# EAGLE board Combined-3 (EAGLE 6.5.0)
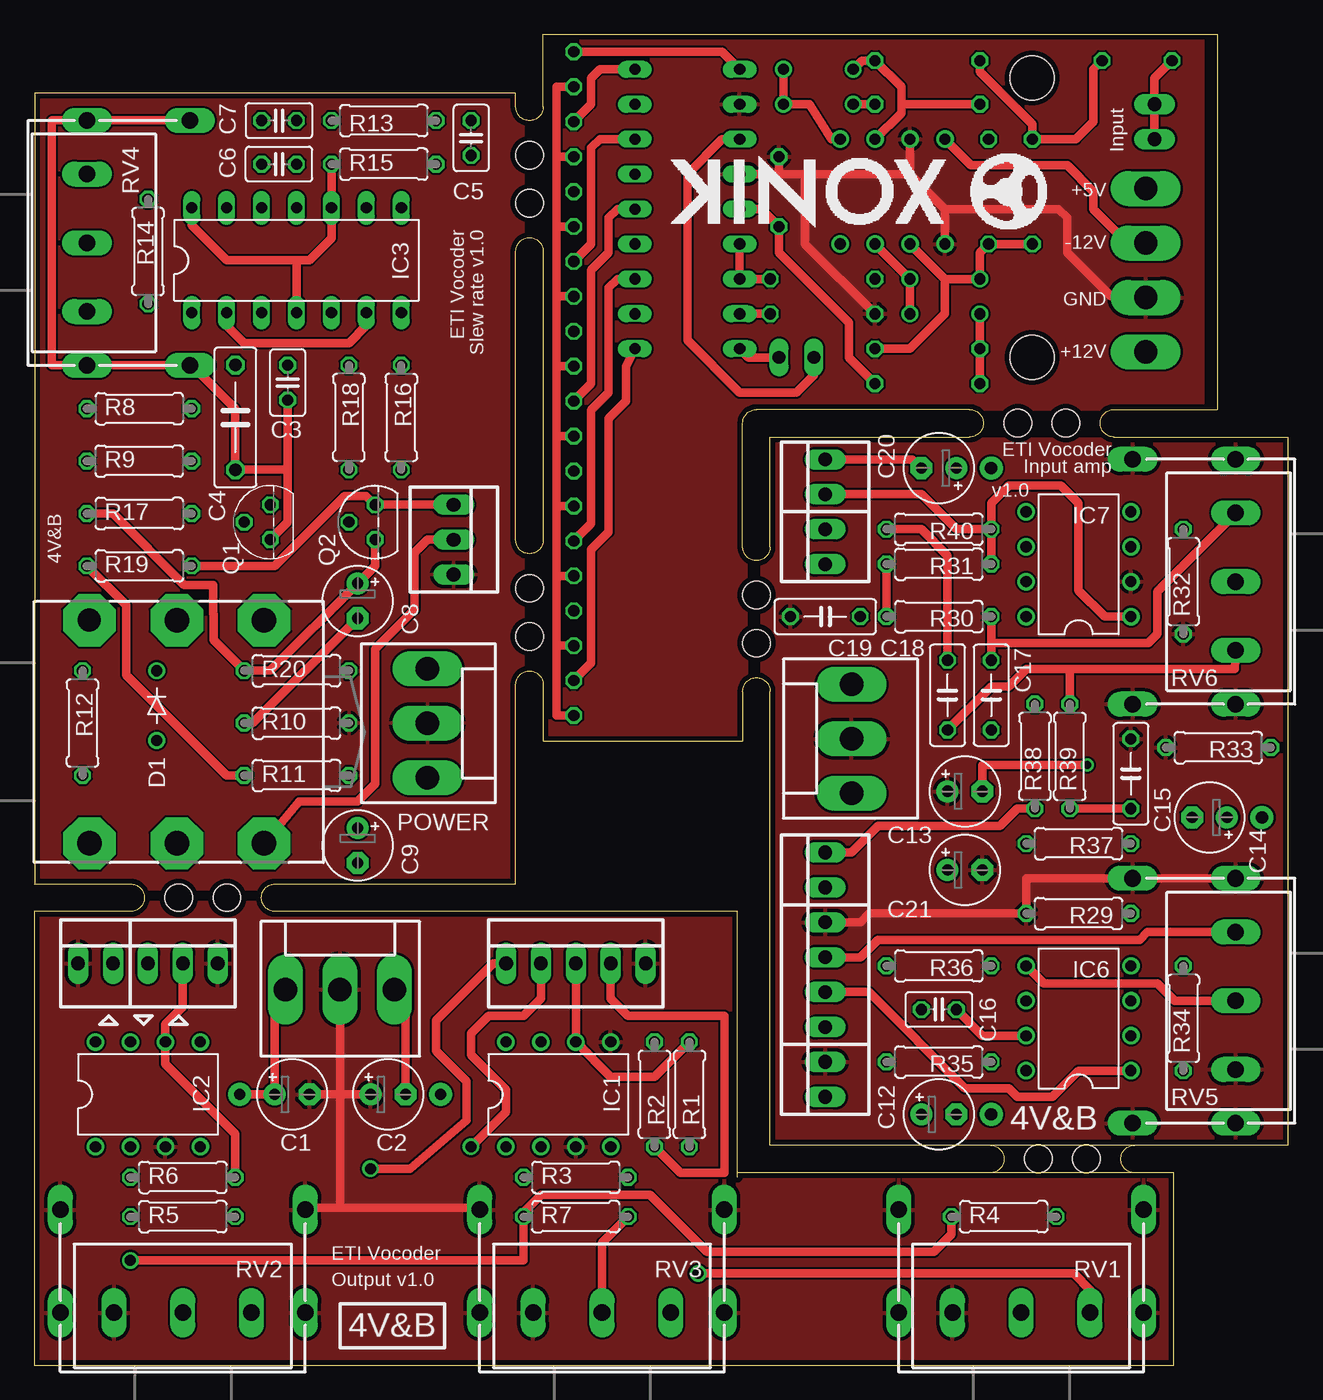
[diagram p0: board, top side]
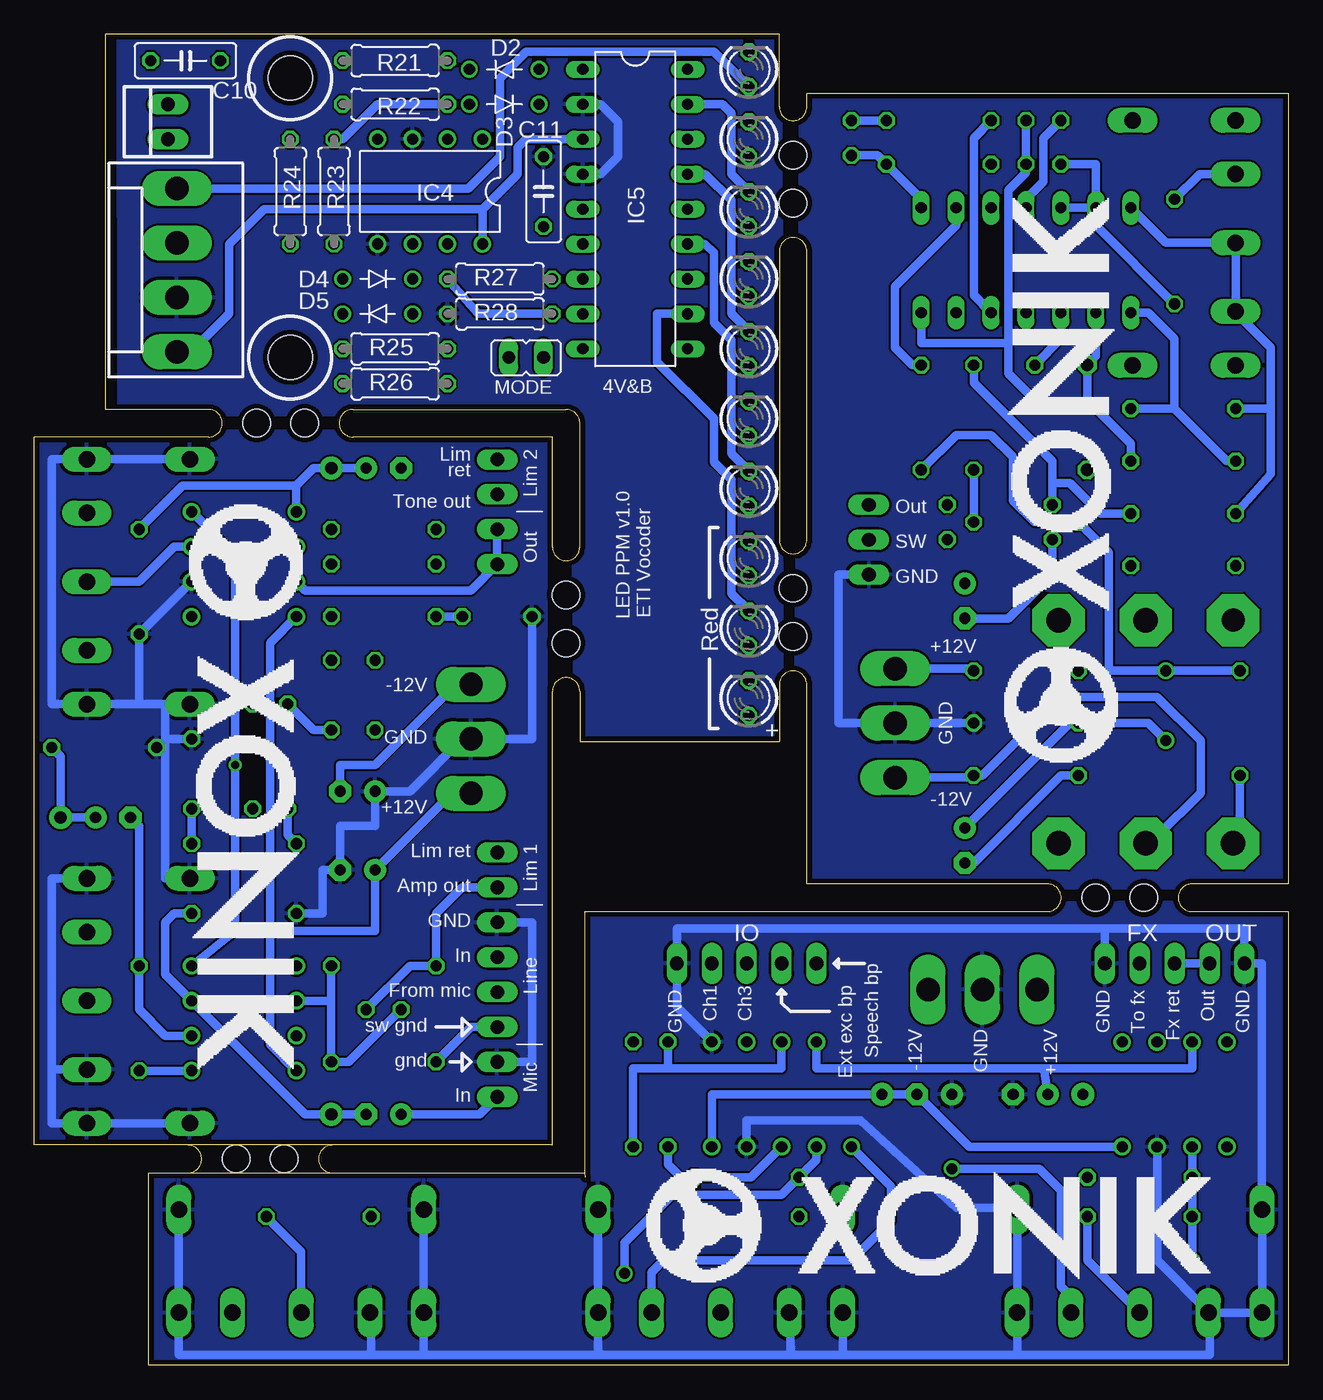
[diagram p1: board, bottom side, seen from below]

Size 91.16 x 96.76 mm. Coordinates in mm from the lower left corner, seen from the top.
Outline: 51.12,13.99 82.86,13.99 82.86,0 0,0 0,32.99 7,32.99 arc180 7,34.99 0,34.99
Outline: 51.11,13.65 51.12,13.99
Outline: 51.12,13.99 51.12,32.99 17.5,32.99 arc-180 17.5,34.99 35,34.99 35,49.49 arc-180 37,49.49 37,45.33 51.5,45.33 51.5,48.99 arc-180 53.5,48.99 53.5,15.99
Outline: 0.01,34.99 0.01,92.49 35,92.49 35,91.49 arc180 37,91.49 37,96.76 86,96.76 86,69.49 78.5,69.49 arc180 78.5,67.49 91.16,67.49 91.16,16.01 53.5,16.01
Outline: 51.5,68.5 51.5,68.49
Outline: 80,13.99 arc-180 80,15.99
Outline: 69.5,15.99 arc-180 69.5,13.99
Outline: 51.5,68.49 arc-90 52.5,69.49 68,69.49 arc-180 68,67.49 53.5,67.49 53.5,59.49 arc-180 51.5,59.49 51.5,68.49
Outline: 35,80.99 arc-180 37,80.99 37,59.99 arc-180 35,59.99 35,80.99
Copper layers (1*16): Top 0.0356mm / dielectric 1.5011mm / Bottom 0.0356mm
Design rules "oshpark-2layer": minimum track width 6mil, minimum drill 13mil, track to track 6mil, track to pad 6mil, pad to pad 6mil, via to via 6mil, smd to smd 6mil, copper to edge 15mil, drill to drill 6mil, minimum pad ring 7mil, minimum via ring 7mil, stop-mask expansion 2.5mil, vias tented up to drill 0mil, thermal gap 10mil
Holes 3.2 mm at 72.56,93.58 72.56,73.27
Holes 2 mm at 10.5,33.99 14,33.99 76.5,14.99 73,14.99 75,68.49 71.5,68.49 52.5,55.99 52.5,52.49 36,87.99 36,84.49 36,56.49 36,52.99

## Footprints (pad centres in the part's own frame; a part is rotated, then mirrored left to right if it is on the bottom)
E2,5-5 = drill 0.813 pad 1.6: + -1.27,0 | drill 0.813 pad 1.6 octagon: - 1.27,0
C025-025X050 = drill 0.813 octagon: 1 -1.27,0; 2 1.27,0
C075-032X103 = drill 0.914 octagon: 1 -3.81,0; 2 3.81,0
C050-025X075 = drill 0.813 octagon: 1 -2.54,0; 2 2.54,0
NMJ6HCD2 = drill 1.778 pad 3.81 octagon: R -10.35,8.115; RN -10.35,-8.115; S -4,8.115; T -16.7,8.115; TN -16.7,-8.115 | drill 1.676 pad 3.81 octagon: SN -4,-8.115
DO35-5J = drill 0.813: A 2.54,0; C -2.54,0
DIL08 = drill 0.813 pad 1.27: 1 -3.81,-3.81; 2 -1.27,-3.81; 3 1.27,-3.81; 4 3.81,-3.81; 5 3.81,3.81; 6 1.27,3.81; 7 -1.27,3.81; 8 -3.81,3.81
DIL14 = drill 0.813 long: 1 -7.62,-3.81; 2 -5.08,-3.81; 3 -2.54,-3.81; 4 0,-3.81; 5 2.54,-3.81; 6 5.08,-3.81; 7 7.62,-3.81; 8 7.62,3.81; 9 5.08,3.81; 10 2.54,3.81; 11 0,3.81; 12 -2.54,3.81; 13 -5.08,3.81; 14 -7.62,3.81
DIL18 = drill 0.813 long: 1 -10.16,-3.81; 2 -7.62,-3.81; 3 -5.08,-3.81; 4 -2.54,-3.81; 5 0,-3.81; 6 2.54,-3.81; 7 5.08,-3.81; 8 7.62,-3.81; 9 10.16,-3.81; 10 10.16,3.81; 11 7.62,3.81; 12 5.08,3.81; 13 2.54,3.81; 14 0,3.81; 15 -2.54,3.81; 16 -5.08,3.81; 17 -7.62,3.81; 18 -10.16,3.81
22-23-2021 = drill 1 long: 1 -1.27,0; 2 1.27,0
22-23-2031 = drill 1 long: 1 -2.54,0; 2 0,0; 3 2.54,0
LED3MM = drill 0.813 octagon: A -1.27,0; K 1.27,0
22-23-2041 = drill 1 long: 1 -3.81,0; 2 -1.27,0; 3 1.27,0; 4 3.81,0
JP1 = drill 0.914 long: 1 0,-1.27; 2 0,1.27
KK-156-3 = drill 1.7 pad 2.184 long: 1 -3.96,0; 2 0,0; 3 3.96,0
KK-156-4 = drill 1.7 pad 2.184 long: 1 -5.94,0; 2 -1.98,0; 3 1.98,0; 4 5.94,0
TO92 = drill 0.813 octagon: 1 1.27,0; 2 0,1.905; 3 -1.27,0
0207/7 = drill 0.813 octagon: 1 -3.81,0; 2 3.81,0
POT16_W_BRACKET = drill 1.2 long: 1A -5,0; 1E 5,0; 1S 0,0; M1 -8.9,0; M2 8.9,0; M3 8.9,7.5; M4 -8.9,7.5
22-23-2051 = drill 1 long: 1 -5.08,0; 2 -2.54,0; 3 0,0; 4 2.54,0; 5 5.08,0

## Placement (x,y rotation side)
C1  1uF  [E2,5-5]  18.73,19.69 0 top
C2  1uF  [E2,5-5]  25.72,19.69 0 top
C3  10n  [C025-025X050]  18.42,71.45 90 top
C4  33n  [C075-032X103]  14.61,68.91 270 top
C5  100p  [C025-025X050]  31.76,89.23 270 top
C6  560p  [C025-025X050]  17.79,87.32 180 top
C7  10n  [C025-025X050]  17.79,90.5 0 top
C8  22u  [E2,5-5]  23.5,55.57 270 top
C9  22u  [E2,5-5]  23.5,37.79 270 top
C10  220n  [C050-025X075]  80.18,94.86 0 bottom
C11  470n  [C050-025X075]  54.14,85.33 270 bottom
C12  1u  [E2,5-5]  65.77,18.23 0 top
C13  22u/25V  [E2,5-5]  67.67,41.73 0 top
C14  22u  [E2,5-5]  85.45,39.82 180 top
C15  220n  [C050-025X075]  79.73,43 90 top
C16  68p  [C025-025X050]  65.77,25.85 0 top
C17  2n2  [C050-025X075]  69.58,48.71 90 top
C18  2n2  [C050-025X075]  66.4,48.71 90 top
C19  220n  [C050-025X075]  57.51,54.43 0 top
C20  1u  [E2,5-5]  65.77,65.22 180 top
C21  22u/25V  [E2,5-5]  67.67,36.01 0 top
CN1  NMJ6HCD2  [NMJ6HCD2]  0,46.05 180 top
D1  1N4148  [DO35-5J]  8.9,47.95 270 top
D2  1N4148DOJ35-5  [DO35-5J]  57,94.22 0 bottom
D3  1N4148DOJ35-5  [DO35-5J]  57,91.68 180 bottom
D4  1N4148DOJ35-5  [DO35-5J]  66.21,78.98 180 bottom
D5  1N4148DOJ35-5  [DO35-5J]  66.21,76.44 0 bottom
IC1  LM1458N  [DIL08]  38.1,19.69 0 top
IC2  LM741P  [DIL08]  8.25,19.69 0 top
IC3  LM556N  [DIL14]  19.06,80.34 0 top
IC4  TL082P  [DIL08]  62.4,85.33 180 bottom
IC5  LM3915N  [DIL18]  47.47,84.06 270 bottom
IC6  LM4558N  [DIL08]  75.92,25.22 90 top
IC7  LM1458N  [DIL08]  75.92,58.24 90 top
IN  22-23-2021  [22-23-2021]  81.45,90.41 90 bottom
J1  22-23-2031  [22-23-2031]  10.79,29.21 0 top
LED1  [LED3MM]  39.22,94.22 90 bottom
LED2  [LED3MM]  39.22,89.14 90 bottom
LED3  [LED3MM]  39.22,84.06 90 bottom
LED4  [LED3MM]  39.22,78.98 90 bottom
LED5  [LED3MM]  39.22,73.9 90 bottom
LED6  [LED3MM]  39.22,68.82 90 bottom
LED7  [LED3MM]  39.22,63.74 90 bottom
LED8  [LED3MM]  39.22,58.66 90 bottom
LED9  [LED3MM]  39.22,53.58 90 bottom
LED10  [LED3MM]  39.22,48.5 90 bottom
LIM1  22-23-2021  [22-23-2021]  57.51,36.01 90 top
LIM2  22-23-2021  [22-23-2021]  57.51,64.59 90 top
LINE  22-23-2041  [22-23-2041]  57.51,28.39 90 top
MIC  22-23-2021  [22-23-2021]  57.51,20.77 90 top
MODE  [JP1]  55.41,73.27 90 bottom
OUT  22-23-2021  [22-23-2021]  57.51,59.51 90 top
POWER  [KK-156-3]  28.58,46.68 270 top
POWER1  [KK-156-4]  80.81,79.61 90 bottom
POWER2  [KK-156-3]  59.41,45.54 90 top
Q1  2N3904  [TO92]  17.15,61.29 90 top
Q2  2N3906  [TO92]  24.77,61.29 90 top
R1  22k  [0207/7]  47.62,19.69 270 top
R2  22k  [0207/7]  45.09,19.69 270 top
R3  33k  [0207/7]  39.37,13.65 180 top
R4  22k  [0207/7]  70.48,10.79 180 top
R5  22k  [0207/7]  10.79,10.79 0 top
R6  22k  [0207/7]  10.79,13.65 0 top
R7  22k  [0207/7]  39.37,10.79 180 top
R8  15k  [0207/7]  7.63,69.54 180 top
R9  2k2  [0207/7]  7.63,65.73 0 top
R10  47R  [0207/7]  19.06,46.68 0 top
R11  220R  [0207/7]  19.06,42.87 0 top
R12  470R  [0207/7]  3.5,46.68 90 top
R13  1k  [0207/7]  25.41,90.5 0 top
R14  2k2  [0207/7]  8.26,80.97 90 top
R15  10k  [0207/7]  25.41,87.32 0 top
R16  10k  [0207/7]  26.68,68.91 270 top
R17  2k2  [0207/7]  7.63,61.92 180 top
R18  10k  [0207/7]  22.87,68.91 90 top
R19  2k2  [0207/7]  7.63,58.11 180 top
R20  47R  [0207/7]  19.06,50.49 0 top
R21  100k  [0207/7]  64.94,94.86 180 bottom
R22  100k  [0207/7]  64.94,91.68 180 bottom
R23  100k  [0207/7]  69.38,85.33 90 bottom
R24  200k  [0207/7]  72.56,85.33 90 bottom
R25  200k  [0207/7]  64.94,73.9 0 bottom
R26  1k  [0207/7]  64.94,71.36 0 bottom
R27  680R  [0207/7]  57.32,78.98 0 bottom
R28  150R  [0207/7]  57.32,76.44 0 bottom
R29  100k  [0207/7]  75.92,32.84 0 top
R30  47k  [0207/7]  65.77,54.43 180 top
R31  1k5  [0207/7]  65.77,58.24 0 top
R32  100k  [0207/7]  83.55,56.97 90 top
R33  470R/5k6  [0207/7]  86.08,44.9 0 top
R34  22k  [0207/7]  83.55,25.22 90 top
R35  11k  [0207/7]  65.77,22.04 0 top
R36  100k  [0207/7]  65.77,29.03 180 top
R37  1k5  [0207/7]  75.92,37.92 0 top
R38  51k  [0207/7]  72.75,44.27 90 top
R39  47k  [0207/7]  75.29,44.27 270 top
R40  51k  [0207/7]  65.77,60.78 0 top
RV1  10k log  [POT16_W_BRACKET]  71.75,3.81 0 top
RV2  10k log  [POT16_W_BRACKET]  10.79,3.81 0 top
RV3  10k log  [POT16_W_BRACKET]  41.27,3.81 0 top
RV4  1M log  [POT16_W_BRACKET]  3.82,81.61 270 top
RV5  10k log  [POT16_W_BRACKET]  87.36,26.49 90 top
RV6  47k lin  [POT16_W_BRACKET]  87.36,56.97 90 top
X1  [KK-156-3]  22.23,27.3 0 top
X2  22-23-2051  [22-23-2051]  39.37,29.21 0 top
X3  22-23-2021  [22-23-2021]  4.45,29.21 0 top
X4  22-23-2031  [22-23-2031]  30.49,60.02 270 top

## Library data of the parts
C1-C5 C7-C21 R1-R40 = resistor
C6 D1-D5 RV1-RV6 = joakim
CN1 = audio
IC1-IC3 IC6 IC7 = linear
IC4 = linear; DATA_SHEET: <a href="http://www.ti.com/lit/ds/symlink/tl084a.pdf"> Data sheet </a>
IC5 = national-semiconductor
IN LIM1 LIM2 MIC OUT X3 = con-molex; MF: MOLEX; MPN: 22-23-2021; OC_FARNELL: 1462926; OC_NEWARK: 25C3832
J1 X4 = con-molex; MF: MOLEX; MPN: 22-23-2031; OC_FARNELL: 1462950; OC_NEWARK: 30C0862
LED1-LED10 = led
LINE = con-molex; MF: MOLEX; MPN: 22-23-2041; OC_FARNELL: 1462920; OC_NEWARK: 38C0355
MODE = jumper
POWER POWER1 POWER2 X1 = con-molex; OC_FARNELL: unknown; OC_NEWARK: unknown
Q1 = transistor
Q2 = transistor-pnp
X2 = con-molex; MF: MOLEX; MPN: 22-23-2051; OC_FARNELL: 1462952; OC_NEWARK: 38C9178

## Nets
0V: C3.1 C4.2 C6.1 C7.2 C8.- C9.+ D1.A IC3.7 Q1.3 R10.1 RV4.M1 RV4.M2 RV4.M3 RV4.M4
+5V: LED1.A LED2.A LED3.A LED4.A LED5.A LED6.A LED7.A LED8.A LED9.A LED10.A POWER1.4
+11V: C8.+ IC3.4 IC3.10 IC3.14 Q2.3 R8.2 R15.1 R17.2 R20.1 RV4.1E RV4.1S
+12V: C1.+ IC1.8 IC2.7 X1.1
+12V1: POWER.1 R20.2
+12V2: IC4.8 IC5.3 MODE.2 POWER1.1
+12V3: C21.+ IC6.8 IC7.8 POWER2.1
-11V: C9.- R11.1 R19.2
-12V: C2.- IC1.4 IC2.4 X1.3
-12V1: CN1.R POWER.3 R11.2
-12V2: IC4.4 POWER1.3
-12V3: C13.- IC6.4 IC7.4 POWER2.3
AMP_OUT: C16.2 IC6.7 LIM1.1 R36.2
BUFFER_IN: C20.- LIM2.2
CH1-2-4: IC1.2 R2.2 R3.1 X2.4
CH3-5-7: IC1.6 R1.1 X2.3
EXT_EXCIT: RV3.1E X2.2
FROM_V/UV_SWITCH: CN1.T X4.2
FX_RETURN: J1.1 X3.2
GND: C1.- C2.+ IC1.3 IC1.5 IC2.3 J1.3 RV1.1A RV1.M1 RV1.M2 RV1.M3 RV1.M4 RV2.1A RV2.M1 RV2.M2 RV2.M3 RV2.M4 RV3.1A RV3.M1 RV3.M2 RV3.M3 RV3.M4 X1.2 X2.5 X3.1
GND1: POWER.2 R10.2 X4.3
GND2: C11.1 IC4.3 IC4.5 IC5.2 IC5.4 POWER1.2 R28.1
GND3: C13.+ C15.2 C19.1 C21.- IC7.2 LINE.4 MIC.2 POWER2.2 R29.1 R32.1 R33.1 RV5.1A RV5.M1 RV5.M2 RV5.M3 RV5.M4 RV6.M1 RV6.M2 RV6.M3 RV6.M4
LINE_IN: LINE.3 RV5.1E
MIC_IN: C12.+ MIC.1
MIC_OUT: IC6.1 LINE.2 R34.1
MIX: IC2.6 J1.2 R6.2
MODE: IC5.9 MODE.1
N$1: R4.1 RV1.1S
N$2: C5.2 IC3.8 R15.2
N$3: IC1.7 R1.2 R2.1
N$4: C4.1 IC3.2 IC3.6 R9.2
N$5: C7.1 IC3.11
N$6: IC1.1 R3.2 RV1.1E
N$7: R7.1 RV3.1S
N$8: IC2.2 R4.2 R5.1 R6.1 R7.2
N$9: IC3.9 R16.1
N$10: R5.2 RV2.1S
N$11: C6.2 IC3.12 IC3.13 R14.1
N$12: C5.1 R13.2
N$13: IC3.5 R13.1
N$14: IC3.1 R8.1 R9.1
N$15: R14.2 RV4.1A
N$16: C3.2 IC3.3
N$17: D1.C Q1.2 R12.2 R16.2
N$18: Q1.1 R17.1 R18.2
N$19: Q2.2 R18.1
N$20: CN1.S R12.1
N$21: D3.A R22.1 R23.2
N$22: D2.C IC4.2 R21.1 R22.2
N$23: D2.A D3.C IC4.1
N$24: D4.A IC4.6 R23.1 R24.1 R25.2
N$25: D5.C R25.1 R26.1
N$26: C10.2 R21.2 R24.2
N$27: D4.C D5.A IC4.7
N$28: C11.2 IC5.5 R26.2
N$29: IC5.6 IC5.7 R27.2
N$30: IC5.1 LED1.K
N$31: IC5.18 LED2.K
N$32: IC5.17 LED3.K
N$33: IC5.16 LED4.K
N$34: IC5.15 LED5.K
N$35: IC5.14 LED6.K
N$36: IC5.13 LED7.K
N$37: IC5.12 LED8.K
N$38: IC5.11 LED9.K
N$39: IC5.10 LED10.K
N$40: C10.1 IN.1 IN.2
N$41: IC5.8 R27.1 R28.2
N$42: C12.- IC6.3 R29.2
N$43: C14.- IC6.2 R34.2
N$44: C14.+ R33.2
N$45: C16.1 IC6.6 R35.2 R36.1
N$46: C15.1 R37.2 R39.2
N$47: C18.1 R39.1 RV6.1A
N$48: C17.2 R30.1 RV6.1E
N$49: C17.1 R38.2
N$50: C18.2 R40.1
N$51: C19.2 R30.2 R31.1
N$52: C20.+ IC7.5 R32.2
N$53: IC7.3 RV6.1S
N$54: IC6.5 RV5.1S
OUT: Q2.1 R19.1 X4.1
OUT1: IC7.6 IC7.7 OUT.1 OUT.2
SPEECH: RV2.1E X2.1
SWITCHED_GND: LINE.1 R35.1
TONE_IN: LIM1.2 R37.1 R38.1
TONE_OUT: IC7.1 LIM2.1 R31.2 R40.2

## Tracks (layer width: path | path; a pad name or v marks a point on that pad's centre or on a via)
0V
  Top 0.61: RV4.M1 RV4.M4 1.29,90.51 1.28,90.5 1.28,72.72 3.81,72.72 RV4.M2 RV4.M3 11.43,72.71 11.44,72.72 14.61,69.54 C4.2 18.42,65.1 | R10.1 15.88,46.68 C8.- | Q1.3 18.42,61.29 18.42,65.1 | C3.1 18.42,65.1
  Bottom 0.61: C7.2 C6.1 19.06,86.69 20.33,85.42 20.33,74.31 | 20.33,74.31 26.68,74.31 IC3.7 | 20.33,74.31 20.33,72.08 C3.1 | C8.- 20.33,54.3 17.15,57.48 Q1.3 | C9.+ 15.88,46.68 R10.1 10.17,46.68 D1.A
+5V
  Top 0.61: LED10.A 37.95,47.23 37.95,52.31 | 37.95,52.31 37.95,57.39 | 37.95,57.39 37.95,62.47 | 37.95,62.47 37.95,67.55 | 37.95,67.55 37.95,72.63 | 37.95,72.63 37.95,77.71 | 37.95,77.71 37.95,82.79 | 37.95,82.79 37.95,87.87 | 37.95,87.87 37.95,92.95 LED1.A | LED2.A 37.95,87.87 | LED3.A 37.95,82.79 | LED4.A 37.95,77.71 | LED5.A 37.95,72.63 | LED6.A 37.95,67.55 | LED7.A 37.95,62.47 | LED8.A 37.95,57.39 | LED9.A 37.95,52.31
  Bottom 0.61: POWER1.4 59.63,85.55 57.32,87.87 57.32,93.58 55.41,95.49 41.76,95.49 LED1.A
+11V
  Top 0.61: R15.1 IC3.10 21.6,81.93 20.01,80.34 19.06,80.34 | 19.06,80.34 13.98,80.34 11.44,82.88 IC3.14 | R17.2 5.72,61.92 10.9,56.74 13,56.74 13,54.62 13.03,54.62 13.03,52.72 R20.1 17.15,50.49 C8.+ 24.77,58.11 Q2.3 | IC3.4 19.06,80.34
  Bottom 0.61: IC3.14 8.9,81.61 RV4.1S RV4.1E 3.82,76.53 1.28,73.99 1.28,69.54 | 1.28,69.54 R8.2 | R17.2 1.28,64.78 1.28,69.54
+12V  (via drill 0.8 pad 1.68)
  Top 0.61: X1.1 17.46,26.5 C1.+ v14.92,19.69
  Bottom 0.61: IC1.8 34.29,21.59 17.78,21.59 | IC2.7 6.98,21.59 17.78,21.59 | 17.78,21.59 C1.+
+12V1
  Bottom 0.61: POWER.1 23.02,50.64 R20.2
+12V2
  Top 0.61: IC5.3 50.02,89.14 47.47,86.6 47.47,74.53 51.28,70.72 55.41,70.72 56.68,71.99 MODE.2
  Bottom 0.61: IC5.3 55.41,89.14 56.05,88.5 56.05,86.6 58.59,84.06 | 58.59,84.06 IC4.8 | POWER1.1 79.77,73.68 77,76.44 77,81.52 74.46,84.06 58.59,84.06
+12V3
  Bottom 0.61: IC6.8 74.02,23.31 74.02,31.57 | 74.02,31.57 74.02,52.52 IC7.8 | POWER2.1 59.56,41.73 60.68,41.73 C21.+ 66.4,31.57 74.02,31.57
-11V
  Top 0.61: R19.2 6.68,55.26 6.68,50.18 13.98,42.87 R11.1
  Bottom 0.61: C9.- 22.87,36.52 16.52,42.87 R11.1
-12V  (via drill 0.8 pad 1.68)
  Top 0.61: C2.- 26.99,26.52 X1.3
  Bottom 0.61: IC2.4 23.18,15.87 C2.- v29.53,19.69 41.91,19.69 IC1.4
-12V1
  Bottom 0.61: POWER.3 23.02,42.72 R11.2 22.23,42.87 16.52,48.59 9.53,48.59 6.36,45.41 6.36,41.6 9.53,38.43 9.85,37.93 CN1.R
-12V2
  Top 0.61: POWER1.3 79.47,81.6 77,84.06 77,85.33 75.1,87.24 68.11,87.24 IC4.4
-12V3  (via drill 0.6)
  Top 0.61: v76.56,43.63 68.94,43.63 C13.-
  Bottom 0.61: POWER2.3 60.53,49.5 66.4,43.63 68.94,43.63 C13.- | IC6.4 76.56,31.57 v76.56,43.63 76.56,58.87 IC7.4
AMP_OUT
  Top 0.61: C16.2 68.94,23.95 IC6.7
  Bottom 0.61: LIM1.1 60.05,34.74 61.96,32.84 R36.2 63.86,29.03 C16.2
BUFFER_IN
  Top 0.61: C20.- 63.86,65.86 LIM2.2
CH1-2-4
  Top 0.61: X2.4 41.91,26.67 43.18,25.4 50.17,25.4 50.17,13.97 46.99,13.97 R2.2
  Bottom 0.61: IC1.2 39.05,13.65 R3.1 44.13,13.65 45.09,14.6 R2.2
CH3-5-7
  Top 0.61: R1.1 45.09,20.96 41.91,20.96 IC1.6 X2.3
EXT_EXCIT  (via drill 0.8)
  Top 0.61: v31.75,15.87 34.29,18.41 34.29,20 31.75,22.54 31.75,24.13 33.02,25.4 35.56,25.4 36.83,26.67 X2.2
  Bottom 0.61: RV3.1E 46.28,6.75 45.4,7.62 31.75,7.62 28.89,10.48 28.89,13.02 v31.75,15.87
FROM_V/UV_SWITCH
  Top 0.61: X4.2 28.58,60.02 27.63,59.07 27.63,54.94 24.77,52.08 24.77,42.24 23.5,40.97 19.24,40.97 CN1.T
FX_RETURN
  Bottom 0.61: X3.2 J1.1
GND
  Top 0.61: X1.2 22.23,19.69 | 22.23,19.69 C1.- | C2.+ 22.23,19.69 | 22.23,19.69 22.23,11.43 | 22.23,11.43 19.81,11.43 RV2.M3 | RV3.M4 32.38,11.42 32.39,11.43 22.23,11.43
  Bottom 0.305: 1.91,3.81 RV2.M1
  Bottom 0.61: RV2.1A 5.8,3.89 9.53,7.62 IC2.3 | 1.91,3.81 RV2.1A | RV2.M1 RV2.M4 1.91,11.32 1.91,29.21 X3.1 3.17,31.75 13.33,31.75 | 19.69,1.91 19.69,0.76 | 19.69,0.76 5.72,0.76 5.72,3.73 RV2.1A | 19.69,1.91 RV2.M2 RV2.M3 19.81,11.43 24.13,11.43 31.12,17.78 39.37,17.78 IC1.3 | 19.69,1.91 19.69,0.9 19.69,0.76 | 19.69,0.76 32.39,0.76 | 32.39,0.76 36.2,0.76 | 36.2,0.76 36.2,3.73 RV3.1A 36.15,0.97 36.2,0.76 | 36.2,0.76 49.85,0.76 | 49.85,0.76 50.17,0.76 | 50.17,0.76 62.86,0.76 | 62.86,0.76 66.67,0.76 | 66.67,0.76 66.67,3.73 RV1.1A | 66.67,0.76 80.64,0.76 80.66,0.77 RV1.M2 RV1.M3 | 13.33,31.75 44.45,31.75 X2.5 44.45,26.03 IC1.5 | RV3.M1 32.38,0.9 32.39,0.76 | 62.86,0.76 62.85,1.03 RV1.M1 RV1.M4 | J1.3 13.33,31.75 | RV3.M3 RV3.M2 | RV3.M2 50.17,0.96 49.85,0.76 | RV3.M2 50.17,0.77 50.17,0.76
  pour Bottom: -0.64,33.65 51.5,33.49 51.5,15.16 52.55,15.16 83.5,14.49 83.5,0.32 82.55,0.32 -0.64,0.32
  pour Top: 0,33.7 51.5,33.49 51.5,15.2 53,15.2 83.5,14.49 83.5,-0.32 0,-0.32
GND1
  Bottom 0.61: R10.2 POWER.2 32.71,46.68 32.71,57.48 X4.3
  pour Top: 35.54,92.78 0,92.78 -0.5,34.63 35.54,34.63
  pour Bottom: 35.43,92.79 -0.51,92.79 -0.51,34.75 35.93,34.75
GND2
  Top 0.61: IC5.4 54.14,86.6 | C11.1 54.14,86.6 | 54.14,86.6 56.05,86.6 | 56.05,86.6 63.67,86.6 | 63.67,86.6 IC4.3 | 66.21,84.06 63.67,86.6 | IC4.5 66.21,84.06 | 66.21,84.06 74.46,84.06 75.1,83.43 75.1,80.88 78.27,77.71 80.74,77.71 POWER1.2 | R28.1 56.05,81.52 56.05,86.6
  Bottom 0.61: IC5.2 50.02,91.68 48.74,90.41 48.74,87.87 50.02,86.6 IC5.4
  pour Bottom: 51.83,45.11 52.02,69.11 85,69.11 85,69.49 85.02,97.44 36.92,97.44 36.83,45.36
  pour Top: 51.74,45.26 36.66,45.1 37.24,97.28 84.93,97.28 84.93,69.51 51.66,69.51
GND3
  Top 0.61: LINE.4 60.05,32.2 60.68,32.84 R29.1 72.11,35.38 72.13,35.39 RV5.M3 RV5.M2
  Bottom 0.61: RV5.M3 81.63,35.39 81.64,35.38 81.64,44.9 | 81.64,44.9 81.64,45.54 | 81.64,45.54 81.64,48.08 | 81.64,48.08 79.86,48.08 RV6.M4 | 83.55,48.07 RV6.M1 87.36,48.08 89.89,48.08 89.89,65.86 89.88,65.87 RV6.M2 RV6.M3 | 83.55,48.07 81.65,48.07 81.64,48.08 | 89.89,21.41 89.89,17.6 89.88,17.59 RV5.M1 RV5.M4 | 89.89,21.41 89.89,35.38 87.36,35.38 RV5.M2 | 83.55,48.07 R32.1 IC7.2 | RV5.1A 89.81,21.49 89.89,21.41 | C15.2 81.64,45.54 | R29.1 70.21,32.84 70.21,36.01 C21.- 68.94,39.19 66.4,39.19 C13.+ 63.86,41.73 60.05,45.54 POWER2.2 54.97,45.54 C19.1 | R33.1 81.64,44.9 | LINE.4 54.97,32.2 54.97,22.04 MIC.2
  pour Top: 91.04,16 53.06,16 52.94,15.88 52.94,67.32 90.78,67.32 90.91,67.44 90.91,16.13
  pour Bottom: 91.8,16.14 54.08,16.14 53.95,16.26 53.95,67.83 91.55,67.83 91.55,16.39
LINE_IN
  Top 0.61: RV5.1E 80.92,31.49 80.37,30.93 61.32,30.93 60.05,29.66 LINE.3
MIC_IN
  Bottom 0.61: C12.+ 58.78,18.23 MIC.1
MIC_OUT
  Top 0.61: IC6.1 75.92,21.41 74.02,19.5 71.48,19.5 70.85,20.14 67.67,20.14 60.68,27.12 LINE.2
  Bottom 0.61: IC6.1 R34.1
MIX
  Top 0.61: R6.2 14.6,16.83 9.53,21.91 IC2.6 9.53,24.76 10.8,26.03 J1.2
MODE
  Top 0.61: IC5.9 51.92,73.27 MODE.1
N$1
  Bottom 0.61: RV1.1S 71.75,8.26 R4.1
N$2
  Bottom 0.61: C5.2 29.85,87.96 R15.2 26.68,84.78 IC3.8
N$3
  Bottom 0.61: IC1.7 36.83,21.59 45.09,21.59 | 45.09,21.59 47.63,21.59 R1.2 | R2.1 45.09,21.59
N$4
  Top 0.61: IC3.6 24.14,75.58 22.87,74.31 15.25,74.31 13.98,75.58 IC3.2
  Bottom 0.61: IC3.2 13.98,73.35 C4.1 14.61,70.18 11.44,67 R9.2
N$5
  Bottom 0.61: IC3.11 19.06,84.78 17.79,86.05 17.79,89.23 C7.1
N$6  (via drill 0.8)
  Top 0.61: v48.26,6.67 75.56,6.67 76.83,5.4 76.83,3.89 RV1.1E
  Bottom 0.61: IC1.1 34.29,14.92 R3.2 36.83,12.38 44.77,12.38 48.26,8.89 v48.26,6.67 | 76.83,3.89 RV1.1E
N$7
  Top 0.61: R7.1 41.28,8.89 RV3.1S
N$8  (via drill 0.8)
  Top 0.61: v6.98,7.62 35.56,7.62 R7.2 35.56,11.11 36.83,12.38 44.77,12.38 48.89,8.26 65.41,8.26 66.67,9.52 R4.2
  Bottom 0.61: v6.98,7.62 R5.1 R6.1 IC2.2
N$9
  Bottom 0.61: IC3.9 24.14,82.88 28.58,78.43 28.58,73.99 27.31,72.72 R16.1
N$10
  Bottom 0.61: RV2.1S 14.6,7.62 R5.2
N$11
  Bottom 0.61: IC3.12 IC3.13 | R14.1 13.98,82.88 IC3.13 | C6.2 13.98,87.32 IC3.13
N$12
  Bottom 0.61: R13.2 C5.1
N$13
  Bottom 0.61: R13.1 22.87,89.23 22.87,77.8 IC3.5
N$14
  Bottom 0.61: IC3.1 10.17,76.53 8.26,74.62 8.26,69.54 | 8.26,69.54 R8.1 | R9.1 4.45,65.73 8.26,69.54
N$15
  Bottom 0.61: RV4.1A 6.44,86.61 R14.2
N$16
  Bottom 0.61: IC3.3 16.52,74.62 C3.2
N$17
  Bottom 0.61: R16.2 24.14,67.64 21.6,67.64 20.01,66.05 20.01,62.88 18.42,61.29 Q1.2 13.03,59.07 13.03,50.49 D1.C R12.2
N$18
  Bottom 0.61: R18.2 22.87,71.45 17.15,65.73 17.15,64.15 | R17.1 13.66,61.92 15.88,64.15 17.15,64.15 | 17.15,64.15 Q1.1
N$19
  Bottom 0.61: R18.1 Q2.2
N$20
  Bottom 0.61: R12.1 3.5,37.93 CN1.S | CN1.S
N$21
  Top 0.61: D3.A R22.1
  Bottom 0.61: R22.1 66.21,91.68 68.75,89.14 R23.2
N$22
  Top 0.61: IC4.2 63.03,91.05 63.03,91.68 | 63.03,91.68 63.03,92.95 R21.1 60.17,94.86 D2.C | R22.2 63.03,91.68
N$23
  Top 0.61: D2.A D3.C 56.36,91.68 57.95,89.14 IC4.1
N$24
  Top 0.61: IC4.6 66.21,78.98 | 66.21,78.98 66.21,76.44 63.67,73.9 R25.2 | 66.21,78.98 D4.A 68.75,80.88 R23.1 R24.1
N$25
  Top 0.61: R26.1 R25.1 D5.C
N$26
  Top 0.61: R21.2 68.75,94.05 72.56,90.24 R24.2 75.73,89.14 77,90.41 77,94.22 C10.2
N$27
  Top 0.61: IC4.7 D4.C D5.A
N$28
  Top 0.61: IC5.5 52.87,84.06 C11.2 54.14,80.88 59.22,75.8 59.22,73.27 R26.2
N$29
  Top 0.61: IC5.6 IC5.7 R27.2
N$30
  Top 0.61: LED1.K 50.02,95.49 IC5.1
N$31
  Top 0.61: LED2.K 40.49,91.68 40.49,93.58 41.13,94.22 IC5.18
N$32
  Bottom 0.61: LED3.K 40.49,86.6 40.49,91.05 41.13,91.68 IC5.17
N$33
  Top 0.61: LED4.K 40.49,81.52 40.49,88.5 41.13,89.14 IC5.16
N$34
  Bottom 0.61: LED5.K 40.49,76.44 40.49,84.69 42.39,86.6 IC5.15
N$35
  Top 0.61: LED6.K 40.49,71.36 40.49,79.61 41.76,80.88 41.76,83.43 42.39,84.06 IC5.14
N$36
  Bottom 0.61: LED7.K 40.49,66.28 40.49,74.53 41.76,75.8 41.76,80.88 42.39,81.52 IC5.13
N$37
  Top 0.61: LED8.K 40.49,61.2 40.49,69.46 41.76,70.72 41.76,78.35 42.39,78.98 IC5.12
N$38
  Bottom 0.61: LED9.K 40.49,56.12 40.49,64.38 41.76,65.64 41.76,68.82 45.89,72.95 45.89,76.44 IC5.11
N$39
  Top 0.61: LED10.K 40.49,51.04 40.49,59.29 41.76,60.57 41.76,68.82 43.03,70.09 43.03,72.63 IC5.10
N$40
  Top 0.61: C10.1 81.45,93.58 IN.2 IN.1
N$41
  Top 0.61: IC5.8 R28.2
  Bottom 0.61: R28.2 58.91,76.44 R27.1
N$42  (via drill 0.9 pad 1.68)
  Bottom 0.61: C12.- v69.58,18.23 71.48,18.23 IC6.3 81.64,28.39 81.64,32.2 81,32.84 R29.2
N$43
  Bottom 0.61: C14.- 83.55,39.19 R34.2 83.55,25.85 81.64,23.95 IC6.2
N$44  (via drill 0.9 pad 1.68)
  Bottom 0.61: C14.+ v89.26,39.82 89.26,44.27 R33.2
N$45
  Bottom 0.61: R36.1 69.58,26.49 | 69.58,26.49 R35.2 68.3,22.04 C16.1 | IC6.6 69.58,26.49
N$46
  Top 0.61: C15.1 R39.2
  Bottom 0.61: R37.2 C15.1
N$47
  Top 0.61: C18.1 69.58,49.35 70.85,49.35 72.11,50.62 75.29,50.62 | 75.29,50.62 87.27,50.62 RV6.1A | R39.1 75.29,50.62
N$48
  Top 0.61: R30.1 69.58,52.52 | C17.2 69.58,52.52 | 69.58,52.52 81,52.52 81.64,53.16 81.64,56.25 RV6.1E
N$49
  Bottom 0.61: R38.2 70.85,46.17 C17.1
N$50
  Top 0.61: C18.2 66.4,58.87 64.5,60.78 R40.1
N$51
  Top 0.61: R30.2 R31.1
  Bottom 0.61: C19.2 R30.2
N$52  (via drill 0.9 pad 1.68)
  Bottom 0.61: R32.2 80.37,63.95 72.11,63.95 | IC7.5 72.11,63.95 | 72.11,63.95 70.85,65.22 v69.58,65.22 C20.+
N$53
  Bottom 0.61: RV6.1S 83.55,56.97 81,59.51 IC7.3
N$54
  Top 0.61: RV5.1S 82.91,26.49 81.64,27.76 73.38,27.76 IC6.5
OUT
  Top 0.61: R19.1 17.47,58.11 22.55,63.19 24.14,63.19 Q2.1 X4.1
OUT1
  Bottom 0.61: IC7.6 IC7.7 71.48,56.33 59.42,56.33 OUT.1 OUT.2
SPEECH  (via drill 0.8)
  Top 0.61: v24.45,14.29 27.3,14.29 31.43,17.78 31.43,20.64 29.21,22.86 29.21,25.08 33.34,29.21 X2.1
  Bottom 0.61: RV2.1E 15.8,5 16.51,5.72 16.51,12.7 18.1,14.29 v24.45,14.29
SWITCHED_GND
  Bottom 0.61: R35.1 59.42,24.58 LINE.1
TONE_IN
  Top 0.61: LIM1.2 59.42,37.28 61.32,39.19 70.21,39.19 71.48,40.46 R38.1
  Bottom 0.61: R37.1 72.75,38.55 R38.1
TONE_OUT
  Top 0.61: IC7.1 77.83,54.43 75.92,56.33 75.92,62.68 74.66,63.95 70.85,63.95 69.58,62.68 R40.2 | R40.2 R31.2 | LIM2.1 64.5,63.32 67.03,60.78 R40.2

## Text on the board
bPlace: 4V&B
tNames: Input | +5V | ETI Vocoder | Slew rate v1.0 | -12V | GND | +12V | ETI Vocoder | Input amp | v1.0 | 4V&B | 4V&B | ETI Vocoder | Output v1.0 | 4V&B
bNames: Lim 2 | Lim | ret | Tone out | Out | Out | SW | GND | Red | ETI Vocoder | LED PPM v1.0 | +12V | -12V | GND | + | GND | -12V | +12V | Lim 1 | Lim ret | Amp out | GND | OUT | FX | IO | Line | In | Speech bp | Ext exc bp | Ch3 | Ch1 | From mic | GND | Out | Fx ret | To fx | GND | GND | sw gnd | +12V | GND | -12V | gnd | Mic | In